# EAGLE board HDA-v1.1 (EAGLE 8.2.1)
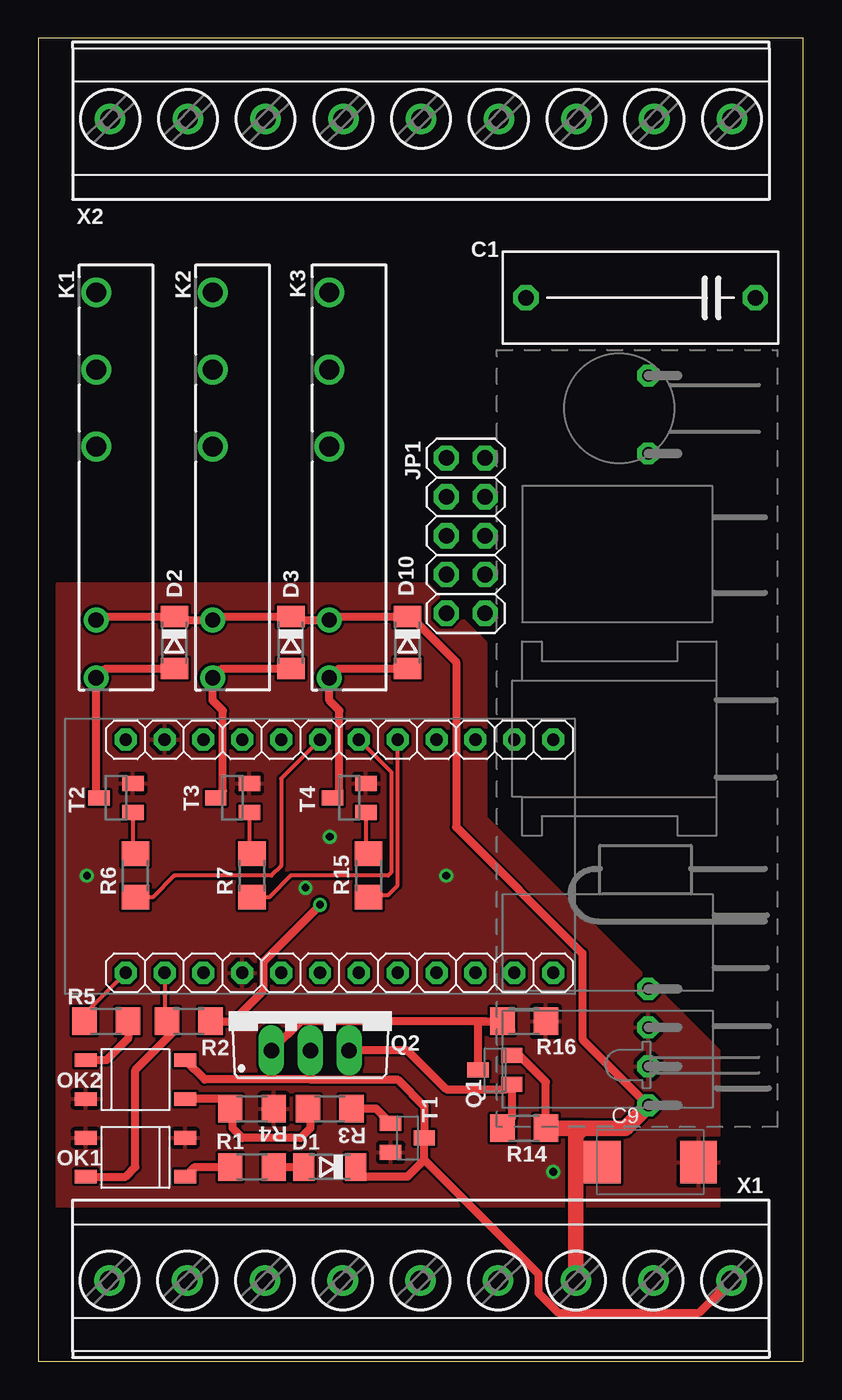
[diagram p0: board, top side]
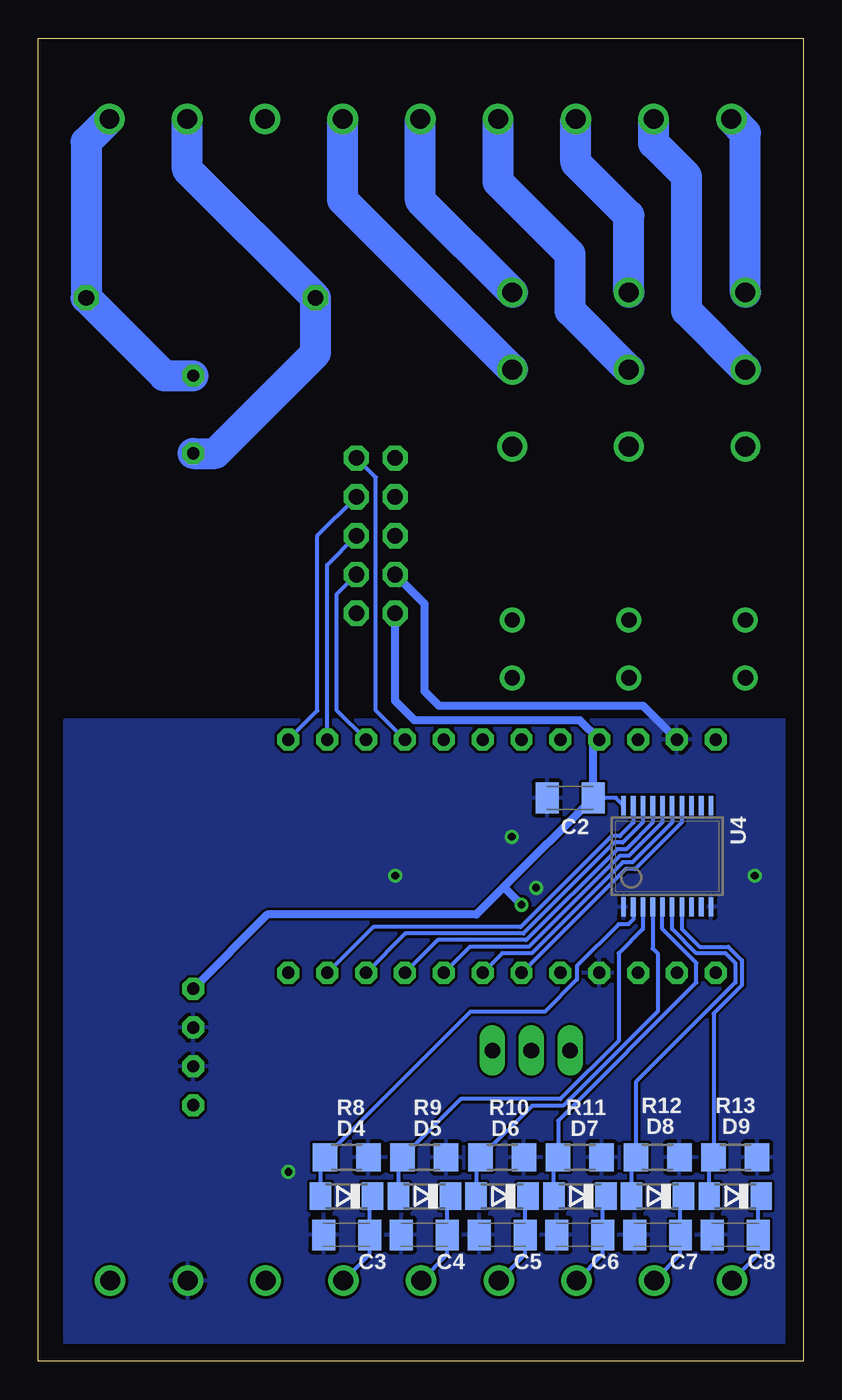
[diagram p1: board, bottom side, seen from below]

Size 50 x 86.5 mm. Coordinates in mm from the lower left corner, seen from the top.
Outline: 0,0 50,0 50,86.5 0,86.5 0,0
Copper layers (1*16): Top 0.035mm / dielectric 1.5mm / Bottom 0.035mm
Design rules "design_rules *": minimum track width 10mil, minimum drill 0.5mm, track to track 7mil, track to pad 7mil, pad to pad 7mil, via to via 7mil, smd to smd 7mil, copper to edge 20mil, drill to drill 8mil, minimum pad ring 12.5mil, minimum via ring 8mil, stop-mask expansion 4mil, vias tented up to drill 0mil, thermal gap 10mil

## Footprints (pad centres in the part's own frame; a part is rotated, then mirrored left to right if it is on the bottom)
ECQUAAF224 = drill 1.016 octagon: 1 -7.493,0; 2 7.493,0
C1206K = smd 1.5 x 2: 1 -1.5,0; 2 1.5,0
SMC_E = smd 2.4 x 2.8: + -3.15,0; - 3.15,0
SOD80C = smd 1.4 x 1.8: A 1.7,0; C -1.7,0
2X05 = drill 1.016 octagon: 1 -5.08,-1.27; 2 -5.08,1.27; 3 -2.54,-1.27; 4 -2.54,1.27; 5 0,-1.27; 6 0,1.27; 7 2.54,-1.27; 8 2.54,1.27; 9 5.08,-1.27; 10 5.08,1.27
PE-FORM-C = drill 1: 1 -13.1,1.3; 2 -9.32,1.3 | drill 1.3: COM 7.06,1.3; NC 2.02,1.3; NO 12.1,1.3
SOP-4-2.54 = smd 0.889 x 1.448: 1 -1.27,-3.25; 2 1.27,-3.25; 3 1.27,3.25; 4 -1.27,3.25
SOT23-BEC = smd 1 x 1.4: B -0.95,-1.1; C 0,1.1; E 0.95,-1.1
TO220BV = drill 1.016 long: D 0,-2.54; G -2.54,-2.54; S 2.54,-2.54
R1206 = smd 1.6 x 1.803: 1 -1.422,0; 2 1.422,0
SOT23 = smd 1 x 1.4: 1 -0.95,-1.1; 2 0.95,-1.1; 3 0,1.1
SM-DLI05A = drill 0.8 octagon: 5V -16.35,4.445; 5V_GND -18.89,4.445; 12V -23.97,4.445; 12V_GND -21.43,4.445; L 23.73,4.445; N 18.65,4.445
ABK-PRO-MINI = drill 0.8 octagon: A0 7.62,-3.81; A1 7.62,-1.27; A2 7.62,1.27; A3 7.62,3.81; D2 -7.62,3.81; D3 -7.62,1.27; D4 -7.62,-1.27; D5 -7.62,-3.81; D6 -7.62,-6.35; D7 -7.62,-8.89; D8 -7.62,-11.43; D9 -7.62,-13.97; D10 7.62,-13.97; D11 7.62,-11.43; D12 7.62,-8.89; D13 7.62,-6.35; GND 7.62,11.43; GND1 -7.62,6.35; RAW 7.62,13.97; RST 7.62,8.89; RST1 -7.62,8.89; RX1 -7.62,11.43; TX0 -7.62,13.97; VCC 7.62,6.35
SSOP20 = smd 0.305 x 1.245: 1 -2.857,-3.302; 2 -2.222,-3.302; 3 -1.587,-3.302; 4 -0.952,-3.302; 5 -0.317,-3.302; 6 0.318,-3.302; 7 0.953,-3.302; 8 1.588,-3.302; 9 2.223,-3.302; 10 2.858,-3.302; 11 2.858,3.302; 12 2.223,3.302; 13 1.588,3.302; 14 0.953,3.302; 15 0.318,3.302; 16 -0.317,3.302; 17 -0.952,3.302; 18 -1.587,3.302; 19 -2.222,3.302; 20 -2.857,3.302
WR-TBL_2445/9 = drill 1.3 pad 2: 1 -20.341,0.025; 2 -15.261,0.025; 3 -10.181,0.025; 4 -5.101,0.025; 5 -0.021,0.025; 6 5.059,0.025; 7 10.139,0.025; 8 15.219,0.025; 9 20.299,0.025

## Placement (x,y rotation side)
C1  220n  [ECQUAAF224]  39.37,69.53 180 top
C2  100n  [C1206K]  15.24,36.83 180 bottom
C3  100n  [C1206K]  29.84,8.26 180 bottom
C4  100n  [C1206K]  24.77,8.26 180 bottom
C5  100n  [C1206K]  19.68,8.26 180 bottom
C6  100n  [C1206K]  14.61,8.26 180 bottom
C7  100n  [C1206K]  9.53,8.26 180 bottom
C8  100n  [C1206K]  4.45,8.26 180 bottom
C9  [SMC_E]  40.01,13.02 0 top
D1  5V1  [SOD80C]  19.05,12.7 180 top
D2  1N4148SMD  [SOD80C]  8.89,46.99 270 top
D3  1N4148SMD  [SOD80C]  16.51,46.99 270 top
D4  5V6  [SOD80C]  29.84,10.79 180 bottom
D5  5V6  [SOD80C]  24.77,10.79 180 bottom
D6  5V6  [SOD80C]  19.68,10.79 180 bottom
D7  5V6  [SOD80C]  14.61,10.79 180 bottom
D8  5V6  [SOD80C]  9.53,10.79 180 bottom
D9  5V6  [SOD80C]  4.45,10.79 180 bottom
D10  1N4148SMD  [SOD80C]  24.13,46.99 270 top
JP1  ETH  [2X05]  27.94,53.98 270 top
K1  FTR-LY  [PE-FORM-C]  5.08,57.78 90 top
K2  FTR-LY  [PE-FORM-C]  12.7,57.78 90 top
K3  FTR-LY  [PE-FORM-C]  20.32,57.78 90 top
OK1  LTV356T  [SOP-4-2.54]  6.35,13.34 90 top
OK2  LTV356T  [SOP-4-2.54]  6.35,18.41 270 top
Q1  2N2907  [SOT23-BEC]  29.84,19.05 90 top
Q2  IRF9Z34N  [TO220BV]  17.78,22.86 0 top
R1  2k2  [R1206]  13.97,12.7 0 top
R2  10k  [R1206]  9.84,22.23 0 top
R3  120  [R1206]  19.05,16.51 180 top
R4  1k  [R1206]  13.97,16.51 180 top
R5  330  [R1206]  4.45,22.23 0 top
R6  2k2  [R1206]  6.35,31.75 90 top
R7  2k2  [R1206]  13.97,31.75 90 top
R8  1k2  [R1206]  29.84,13.34 180 bottom
R9  1k2  [R1206]  24.77,13.34 180 bottom
R10  1k2  [R1206]  19.68,13.34 180 bottom
R11  1k2  [R1206]  14.61,13.34 180 bottom
R12  1k2  [R1206]  9.53,13.34 180 bottom
R13  1k2  [R1206]  4.45,13.34 180 bottom
R14  2.7  [R1206]  31.75,15.24 180 top
R15  2k2  [R1206]  21.59,31.75 90 top
R16  10k  [R1206]  31.75,22.23 180 top
T1  BC817  [SOT23-BEC]  24.13,14.61 270 top
T2  BC846  [SOT23]  5.08,36.83 90 top
T3  BC846  [SOT23]  12.7,36.83 90 top
T4  BC846  [SOT23]  20.32,36.83 90 top
U1  SM-DLI05A  [SM-DLI05A]  44.32,40.71 90 top
U2  ABK-PRO-MINI  [ABK-PRO-MINI]  19.68,33.02 90 top
U4  MAX6818  [SSOP20]  8.89,33.02 0 bottom
X1  WR-TBL_2445/9  [WR-TBL_2445/9]  25,5.25 0 top
X2  WR-TBL_2445/9  [WR-TBL_2445/9]  25,81.25 180 top

## Library data of the parts
C1 OK1 OK2 U1 U2 X1 X2 = bauteile
C2-C9 R1-R16 = resistor
D1-D10 = diode
JP1 = pinhead
K1-K3 = bauteile; MPN: APE3004H; OC_FARNELL: unknown; OC_NEWARK: 55M0343
Q1 = transistor-pnp
Q2 = transistor-power
T1 = transistor-npn
T2-T4 = transistor-neu-to92
U4 = Max68x

## Nets
+5V: C2.1 JP1.9 R2.2 U1.5V U2.VCC U4.20
+12V: C9.+ D2.C D3.C D10.C K1.2 K2.2 K3.2 Q1.E R14.1 U1.12V X1.7
DALI+: D1.C OK2.4 Q2.D T1.C X1.9
DALI_RX: OK1.4 R2.1 U2.RX1
DALI_TX: R5.1 U2.TX0
GND: C2.2 C3.2 C4.2 C5.2 C6.2 C7.2 C8.2 C9.- JP1.7 OK1.2 OK1.3 OK2.2 R4.1 R8.1 R9.1 R10.1 R11.1 R12.1 R13.1 R16.1 T1.E T2.2 T3.2 T4.2 U1.5V_GND U1.12V_GND U2.GND U2.GND1 U4.1 U4.10 X1.8
L: C1.1 U1.L X2.1
MISO: JP1.8 U2.D12
MOSI: JP1.6 U2.D11
N: C1.2 U1.N X2.2
N$1: D1.A R1.2
N$2: OK1.1 R1.1
N$3: Q1.B Q2.S R14.2
N$5: R3.1 T1.B
N$6: OK2.3 R3.2 R4.2
N$7: Q1.C Q2.G R16.2
N$11: OK2.1 R5.2
N$19: R15.2 T4.1
N$20: R6.2 T2.1
N$21: R7.2 T3.1
N$22: D3.A K2.1 T3.3
N$23: D8.A R12.2 U4.6
N$24: D2.A K1.1 T2.3
N$25: D9.A R13.2 U4.7
N$26: D4.A R8.2 U4.2
N$27: D5.A R9.2 U4.3
N$28: D6.A R10.2 U4.4
N$29: D7.A R11.2 U4.5
N$30: D10.A K3.1 T4.3
N$31: U2.D5 U4.16
N$32: U2.D6 U4.17
N$33: U2.D7 U4.18
N$34: U2.D8 U4.19
N$35: U2.D4 U4.15
N$36: U2.D3 U4.14
REL1: R6.1 U2.A2
REL1_COM: K1.COM X2.8
REL1_NO: K1.NO X2.9
REL2: R7.1 U2.A1
REL2_COM: K2.COM X2.6
REL2_NO: K2.NO X2.7
REL3: R15.1 U2.A0
REL3_COM: K3.COM X2.4
REL3_NO: K3.NO X2.5
SCK: JP1.2 U2.D13
SS: JP1.4 U2.D10
SW1: C8.1 D9.C X1.1
SW2: C7.1 D8.C X1.2
SW3: C6.1 D7.C X1.3
SW4: C5.1 D6.C X1.4
SW5: C4.1 D5.C X1.5
SW6: C3.1 D4.C X1.6

## Tracks (layer width: path | path; a pad name or v marks a point on that pad's centre or on a via)
+5V  (via drill 0.5)
  Top 0.508: R2.2 12.7,22.23 14.73,24.25 14.73,26.16 v18.41,29.84
  Bottom 0.254: U4.20 12.26,36.83 C2.1
  Bottom 0.508: 19.57,31 C2.1 13.74,40.23 U2.VCC 14.61,41.91 25.4,41.91 26.67,43.18 JP1.9 | 19.57,31 21.36,29.21 35.03,29.21 U1.5V | v18.41,29.84 19.57,31
+12V
  Top 0.508: R14.1 33.17,18.26 31.43,20 Q1.E | K1.2 4,48.69 D2.C 9.12,48.47 K2.2 11.62,48.69 D3.C 16.73,48.47 K3.2 19.25,48.69 D10.C 24.34,48.69 27.3,45.72 27.3,34.92 35.56,26.67 35.56,21.06 U1.12V
  Top 1.016: U1.12V 38.38,15.24 35.56,15.24 | 35.56,15.24 R14.1 33.02,15.24 | X1.7 35.14,12.7 | 35.14,12.7 35.14,14.82 35.56,15.24 | 35.14,12.7 35.46,13.02 C9.+
DALI+
  Top 0.508: D1.C 21.39,12.06 24.13,12.06 25.23,13.16 | 25.23,13.16 T1.C 25.23,16.68 23.5,18.41 17.78,18.41 | OK2.4 10.87,18.41 17.78,18.41 | 25.23,13.16 32.7,5.69 32.7,4.45 33.97,3.17 43.2,3.17 X1.9 | Q2.D 17.78,18.41
DALI_RX
  Top 0.254: U2.RX1 8.26,22.71 8.89,22.07
  Top 0.508: OK1.4 5.71,12.06 6.35,12.7 6.35,19.05 8.89,21.59 8.89,22.07 R2.1
DALI_TX
  Top 0.254: R5.1 3.02,22.71 U2.TX0
GND  (via drill 0.5)
  Bottom 0.508: JP1.7 24.77,49.53 24.77,43.81 23.81,42.86 10.48,42.86 U2.GND
  other vias: 19.05,34.29 33.66,12.38 3.17,31.75 26.67,31.75 17.46,30.96
  pour Top: 1.27,10.16 1.27,50.8 21.59,50.8 25.4,50.8 29.21,46.99 29.21,35.56 38.1,26.67 44.45,20.32 44.45,10.16
  pour Bottom: 1.27,1.27 1.27,41.91 48.26,41.91 48.26,1.27
L
  Bottom 2.032: X2.1 46.86,79.7 C1.1 41.77,64.44 U1.L
MISO
  Bottom 0.254: U2.D12 30.48,42.55 30.48,50.16 JP1.8
MOSI
  Bottom 0.254: U2.D11 31.11,52.07 JP1.6
N
  Bottom 2.032: U1.N 38.43,59.36 31.88,65.91 C1.2 40.26,77.92 X2.2
N$1
  Top 0.508: R1.2 D1.A
N$2
  Top 0.508: OK1.1 10.23,12.7 R1.1
N$3
  Top 0.508: R14.2 30.95,15.86 Q1.B 30.62,17.78 26.67,17.78 24.13,20.32 Q2.S
N$5
  Top 0.508: T1.B 22.07,16.51 R3.1
N$6
  Top 0.508: OK2.3 11.91,17.14 R4.2 12.7,16.36 12.7,15.24 13.34,14.61 17.14,14.61 17.78,15.24 17.78,16.36 R3.2
N$7
  Top 0.508: 30.95,21.61 R16.2 29.21,22.23 | Q2.G 17.14,22.23 29.21,22.23 | Q1.C 28.75,22.23 29.21,22.23
N$11
  Top 0.508: R5.2 5.87,21.11 4.45,19.68 OK2.1
N$19
  Top 0.254: T4.1 21.42,33.34 R15.2
N$20
  Top 0.254: T2.1 6.18,33.34 R6.2
N$21
  Top 0.254: T3.1 13.8,33.34 R7.2
N$22
  Top 0.508: T3.3 12.06,37.3 12.06,42.55 11.4,43.21 K2.1 12.01,45.29 D3.A
N$23
  Bottom 0.254: D8.A 11.22,13.06 R12.2 10.95,18.26 4.45,24.77 4.45,26.04 5.08,26.67 6.99,26.67 8.57,28.26 U4.6
N$24
  Top 0.508: T2.3 3.78,37.03 K1.1 4.38,45.29 D2.A
N$25
  Bottom 0.254: D9.A 6.14,13.06 R13.2 5.87,22.73 4.01,24.59 4.01,26.21 4.9,27.1 6.78,27.1 7.94,28.26 U4.7
N$26
  Bottom 0.254: D4.A 31.55,13.06 R8.2 21.74,22.86 16.88,22.86 14.79,24.95 14.79,25.85 12.06,28.57 11.43,28.57 11.11,28.89 U4.2
N$27
  Bottom 0.254: 26.46,13.06 D5.A | 26.46,13.06 R9.2 | U4.3 10.48,28.26 12.06,26.67 12.06,20.95 15.88,17.14 22.38,17.14 26.46,13.06
N$28
  Bottom 0.254: D6.A 21.39,13.06 R10.2 17.73,16.71 15.7,16.71 15.26,17.14 15.24,17.14 9.53,22.86 9.53,26.67 9.84,26.99 U4.4
N$29
  Bottom 0.254: D7.A 16.3,13.06 R11.2 16.03,15.72 6.99,24.77 6.99,26.04 9.21,28.26 U4.5
N$30
  Top 0.508: T4.3 19.68,37.3 19.68,42.55 19.02,43.21 K3.1 19.62,45.29 D10.A
N$31
  Bottom 0.254: U4.16 9.21,35.24 11.4,33.05 11.99,33.05 17.93,27.1 21.79,27.1 U2.D5
N$32
  Bottom 0.254: U4.17 9.84,35.22 11.58,33.48 12.17,33.48 18.11,27.53 23.9,27.53 U2.D6
N$33
  Bottom 0.254: U4.18 10.48,35.24 11.81,33.91 12.35,33.91 18.29,27.96 26.01,27.96 U2.D7
N$34
  Bottom 0.254: U4.19 11.11,35.22 11.99,34.34 12.53,34.34 18.47,28.4 28.12,28.4 U2.D8
N$35
  Bottom 0.254: U4.15 8.57,35.22 11.18,32.61 11.81,32.61 17.76,26.67 19.68,26.67 U2.D4
N$36
  Bottom 0.254: U4.14 7.94,35.24 11,32.18 11.61,32.18 15.54,28.25 15.57,28.25 U2.D3
REL1
  Top 0.254: U2.A2 15.88,38.1 15.88,32.38 15.24,31.75 8.89,31.75 7.47,30.33 R6.1
REL1_COM
  Bottom 2.032: K1.COM 7.62,68.69 7.62,77.47 9.78,79.63 X2.8
REL1_NO
  Bottom 2.032: K1.NO 3.78,80.3 X2.9
REL2
  Top 0.254: U2.A1 23.06,38.53 23.06,31.95 22.86,31.75 16.51,31.75 15.09,30.33 R7.1
REL2_COM
  Bottom 2.032: K2.COM 15.24,68.69 15.24,72.39 19.94,77.09 X2.6
REL2_NO
  Bottom 2.032: K2.NO 11.4,74.9 14.86,78.36 X2.7
REL3
  Top 0.254: R15.1 21.74,30.48 22.86,30.48 23.5,31.11 U2.A0
REL3_COM
  Bottom 2.032: K3.COM 30.1,75.93 X2.4
REL3_NO
  Bottom 2.032: K3.NO 25.02,75.89 X2.5
SCK
  Bottom 0.254: U2.D13 27.94,42.55 27.94,57.78 JP1.2
SS
  Bottom 0.254: U2.D10 31.75,42.55 31.75,53.98 JP1.4
SW1
  Bottom 0.254: X1.1 2.94,6.99 C8.1 2.94,10.6 D9.C
SW2
  Bottom 0.254: X1.2 8.03,6.99 C7.1 8.03,10.6 D8.C
SW3
  Bottom 0.254: X1.3 13.11,6.99 C6.1 13.11,10.6 D7.C
SW4
  Bottom 0.254: X1.4 18.18,6.99 C5.1 18.18,10.6 D6.C
SW5
  Bottom 0.254: X1.5 23.27,6.99 C4.1 23.27,10.6 D5.C
SW6
  Bottom 0.254: X1.6 28.34,6.99 C3.1 28.34,10.6 D4.C

## Text on the board
Document: HDA / v1.0